# Altium PCB NORA_V0.01.PcbDoc (part 2 of 3)
Units mm, origin at the board's own origin, x right, y up, seen from the top; angles counter-clockwise.
Board outline 161.42 x 170.81 mm, 2 copper layers (Top Layer, Bottom Layer), stack 1.671 mm thick; 329 components, 221 nets, 903 pads, 560 vias.
Unrouted connection lines stored in the file: 1.
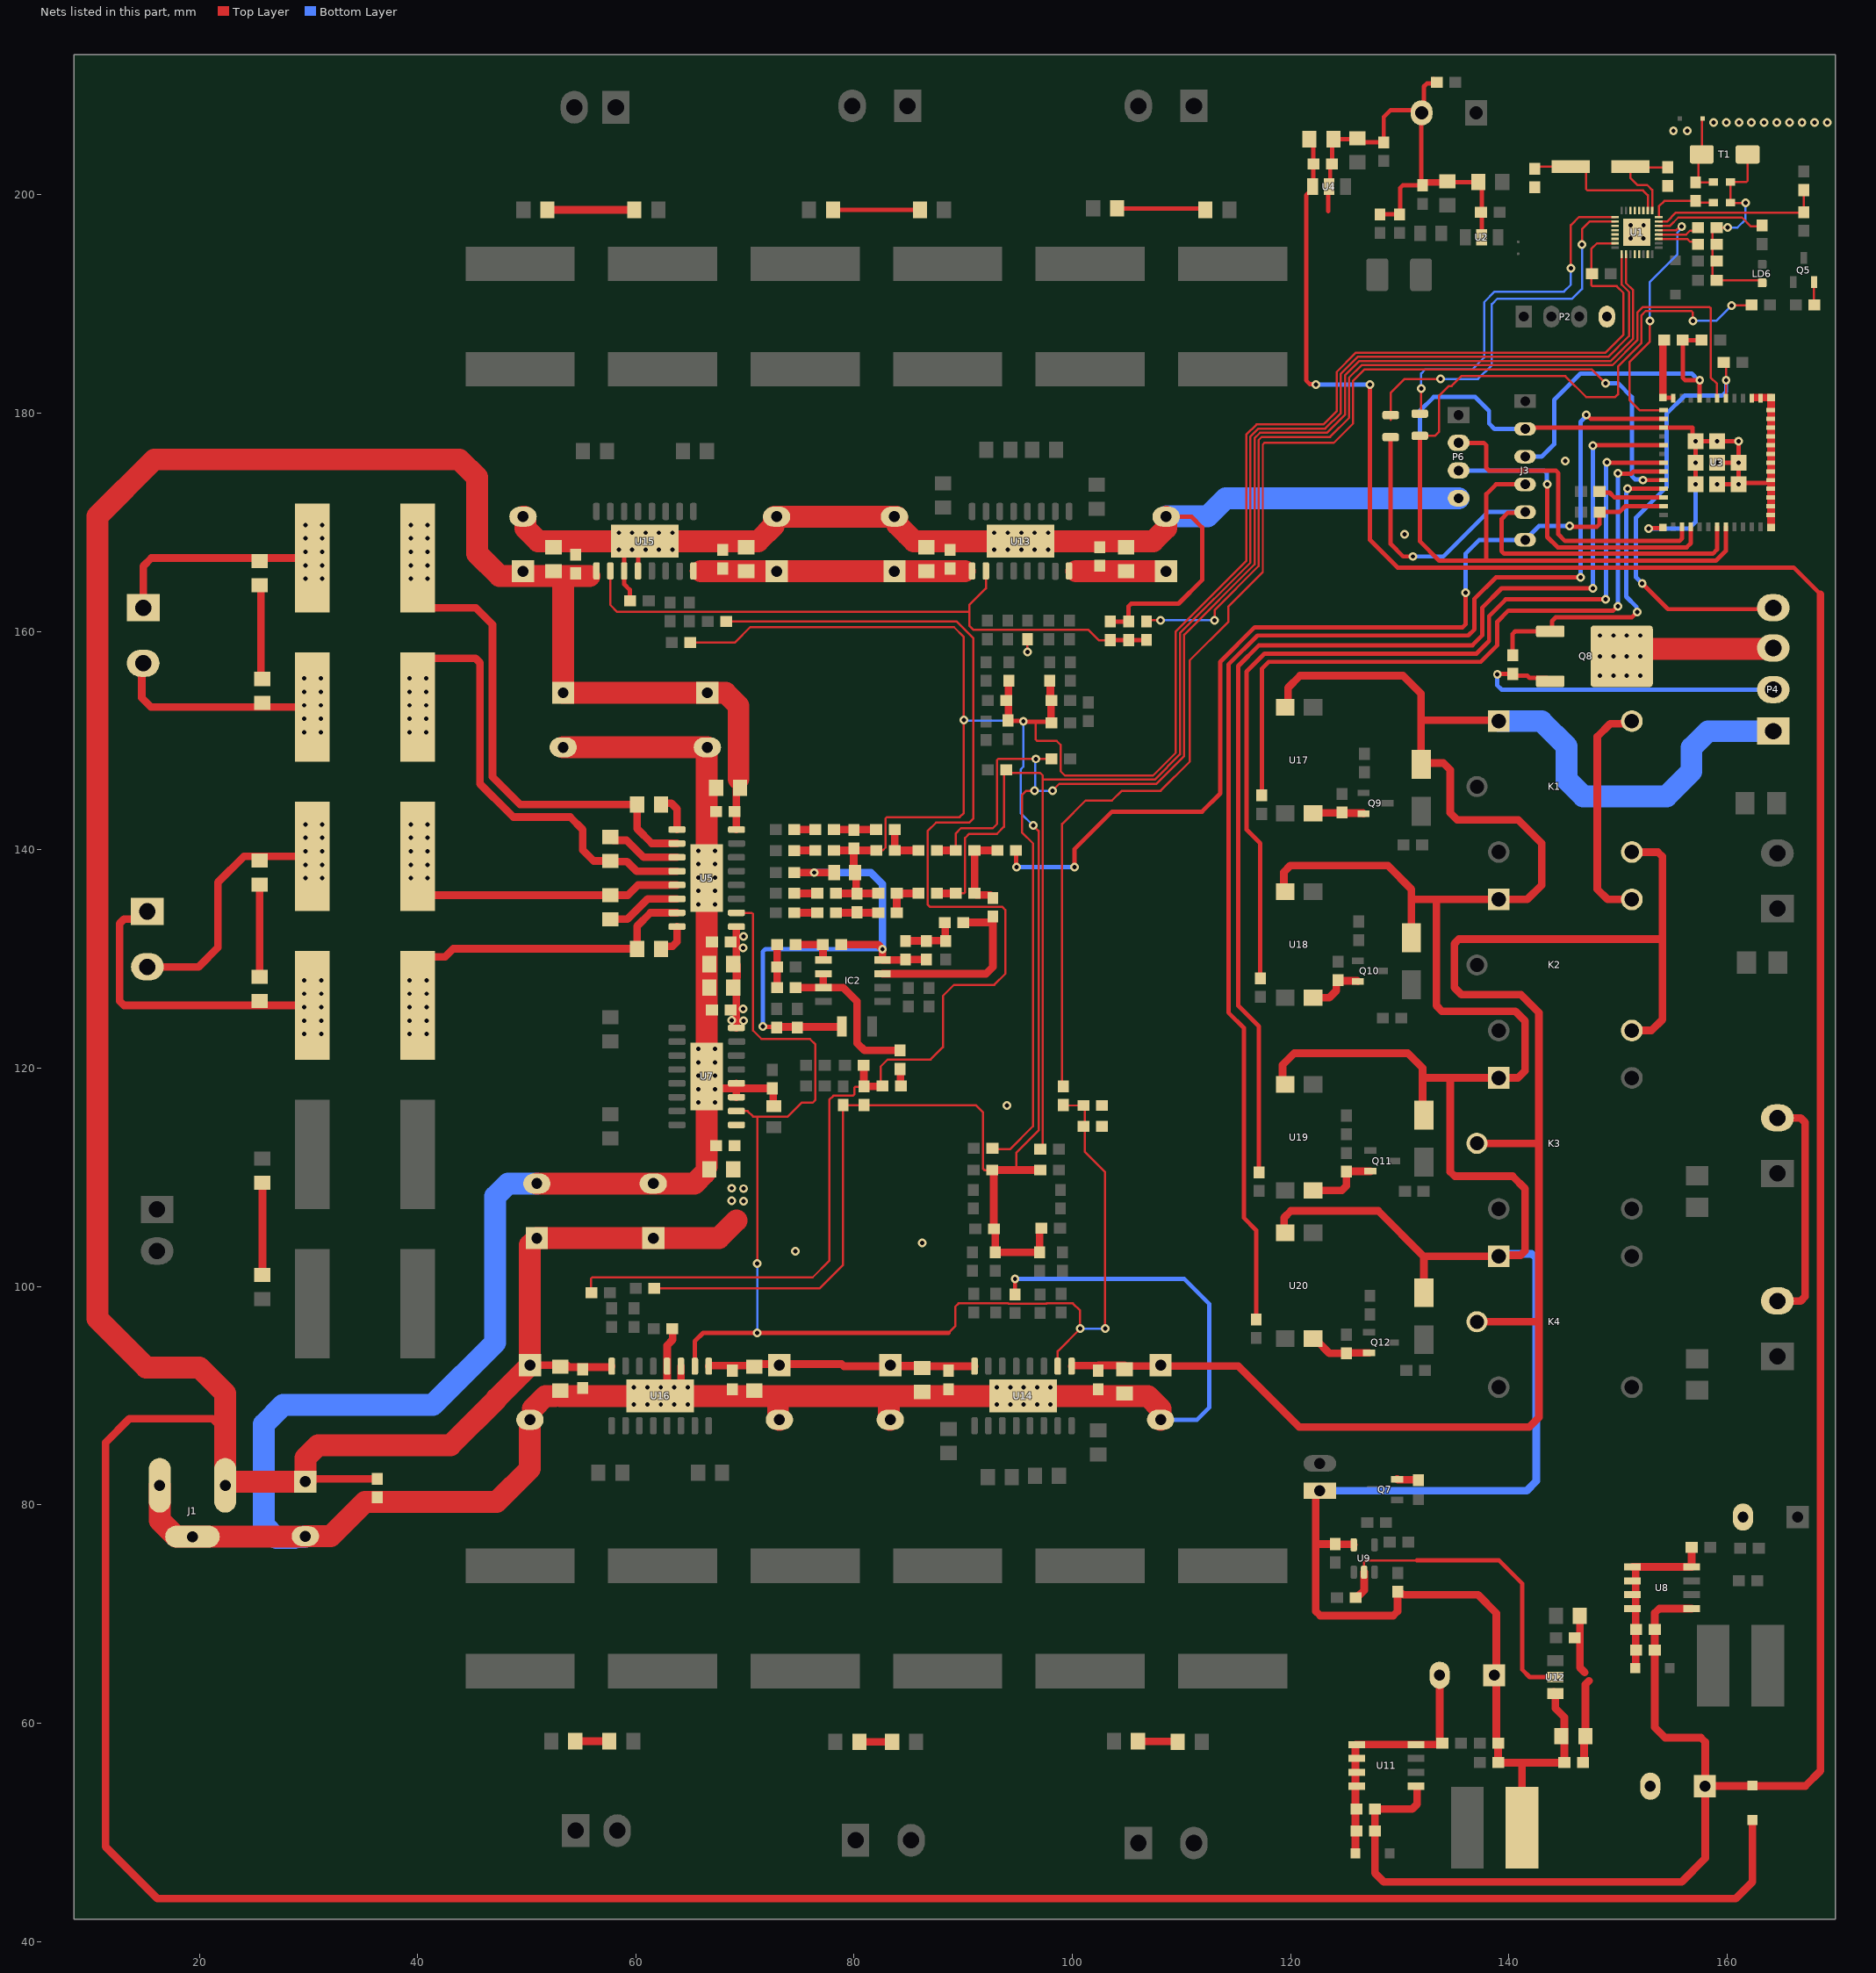
[diagram p2: the nets of this part, all layers, seen from the top]

## Via types
v1: diameter 0.8, hole 0.4, Top Layer to Bottom Layer, 560 vias

## Nets (pads, with @x,y where several pads share a name; then routed paths per layer and width w, separated by ;. In a path a pad name is that pad's centre, name@x,y a point inside that pad or via, vN(x,y) a via of type N, cw(c..) or ccw(c..) an arc to the next point about the centre after c; other vN are vias at no path point) (continued)
12V_FAN: C80.2 C81.2 C93.1 C96.1 D5.C D6.C D7.C D8.C K1.A1 K2.A1 K3.A1 K4.A1 L10.1 P4.1 R16.2 R33.2 R62.2 U6.1 U9.5 U12.3 U17.4 U18.4 U19.4 U20.4 | length 329.3
  Top Layer w0.7: U20.4@119.253,104.926 119.397,105.07 119.397,106.316 120.015,106.934 128.016,106.934 132.207,102.743 ; U19.4@119.253,118.515 119.253,120.315 120.309,121.371 130.724,121.371 132.08,120.015 132.08,115.815 D7.C@132.207,115.688 ; U18.4@119.38,136.168 119.38,137.968 119.969,138.557 128.905,138.557 131.064,136.398 D6.C@131.064,131.944 ; U17.4@119.507,153.059 119.761,153.313 119.761,154.859 120.858,155.956 130.302,155.956 131.953,154.305 D5.C@131.953,147.819 132.089,147.955 133.985,147.955 134.62,147.32 134.62,143.383 135.255,142.748 140.843,142.748 143.002,140.589 143.002,136.779 141.68,135.457 K2.A1@139.061,135.457 133.35,135.457 ; U6.1@122.665,81.299 122.301,80.935 122.301,76.327 ; U9.5@125.777,76.34 125.739,76.378 124.116,76.378 R16.2@124.079,76.415 122.389,76.415 122.301,76.327 ; R62.2@129.794,71.998 129.944,71.848 130.258,71.848 130.354,71.752 137.163,71.752 138.835,70.08 138.835,58.316 C96.1@138.985,58.166 ; R62.2@129.794,72.048 129.794,70.26 129.384,69.85 122.711,69.85 122.301,70.26 122.301,76.327 ; 131.064,135.457 133.35,135.457 ; 131.953,151.883 138.977,151.883 K1.A1@139.061,151.799 ; 132.08,118.999 132.197,119.116 134.493,119.116 ; D8.C@132.207,99.432 132.207,102.743 ; C96.1@139.026,58.166 139.026,58.044 138.998,58.016 138.998,56.416 R33.2@139.026,56.388 141.184,56.388 ; L10.1@141.184,50.419 141.184,56.388 ; U12.3@144.103,62.871 U12.3@144.253,62.721 144.253,61.36 145.073,60.54 C80.2@145.073,58.82 ; C80.2@144.806,58.82 C80.2@145.073,58.82 ; 132.207,102.743 132.238,102.774 K4.A1@139.061,102.774 139.157,102.87 141.068,102.87 141.478,103.28 141.478,108.966 140.335,110.109 135.03,110.109 134.62,110.519 134.62,118.989 134.493,119.116 ; 133.35,135.457 133.35,125.73 133.858,125.222 140.589,125.222 141.478,124.333 141.478,119.761 140.833,119.116 K3.A1@139.061,119.116 134.493,119.116 ; 141.184,56.388 C81.2@145.073,56.388 C80.2@145.073,58.82
  Bottom Layer w0.7: U6.1@122.665,81.299 141.624,81.299 142.494,82.169 142.494,102.587 142.084,102.997 139.284,102.997 K4.A1@139.061,102.774
  Bottom Layer w2: K1.A1@139.061,151.799 142.968,151.799 145.288,149.479 145.288,146.431 146.812,144.907 154.432,144.907 156.718,147.193 156.718,149.352 158.242,150.876 P4.1@164.211,150.876
12V_P: 
24V_P: C6.1 C12.2 C13.1 C14.1 C16.2 C22.1 C24.1 C25.1 C26.2 C27.1 C28.1 C53.1 C55.2 C56.1 C84.1 C85.2 C86.1 C87.1 C88.2 C103.1 C138.1 C139.2 C140.1 C141.1 C143.2 C144.1 C145.1 C146.2 C147.1 C148.1 C149.2 C150.1 C167.1 C168.2 C169.1 C170.1 C171.2 C172.1 D1.2 J1.1 K1.NO K2.NO K3.COM K4.COM U5.1 U5.8 U7.1 U7.8 U13.1 U13.8 U14.1 U14.8 U15.1 U15.8 U16.1 U16.8 | length 709.5
  Top Layer w0.7: 22.375,86.718 21.209,87.884 13.589,87.884 11.41,85.705 11.41,48.686 16.154,43.942 160.782,43.942 162.306,45.466 D1.2@162.306,51.13 ; C25.1@29.718,82.129 29.973,82.384 C24.1@36.322,82.384 ; C170.1@50.292,92.797 50.293,92.796 53.699,92.796 53.873,92.622 57.735,92.622 57.785,92.672 U16.8@57.785,92.699 ; U15.8@65.278,165.55 65.913,165.55 ; U16.1@66.675,92.699 66.724,92.748 70.866,92.748 71.018,92.9 78.867,92.9 79.069,92.699 ; U5.1@69.215,132.715 C16.2@69.215,129.54 ; U5.8@69.215,141.859 69.215,143.51 69.215,145.669 69.215,146.685 ; C141.1@83.263,92.699 79.069,92.699 ; C141.1@83.312,92.797 83.263,92.748 C143.2@86.233,92.748 ; C144.1@88.646,92.699 U14.8@91.031,92.699 79.069,92.699 ; 90.17,165.55 U13.1@90.805,165.55 ; U13.8@99.695,165.55 99.71,165.535 100.33,165.535 ; U14.1@99.921,92.699 99.97,92.748 102.362,92.748 102.387,92.773 C88.2@104.775,92.773 ; C88.2@104.775,92.413 105.072,92.71 115.189,92.71 120.777,87.122 141.859,87.122 142.748,88.011 142.748,96.774 ; K4.COM@137.061,96.774 142.748,96.774 ; K3.COM@137.061,113.116 142.748,113.116 ; K2.NO@151.261,123.457 153.048,123.457 154.051,124.46 154.051,131.925 ; K1.NO@151.261,139.799 153.641,139.799 154.051,139.389 154.051,131.925 ; C12.2@69.215,127.381 69.215,128.27 ; C12.2@69.215,127.381 U7.8@69.215,123.698 69.215,128.27 ; C12.2@69.215,127.381 69.215,128.333 C16.2@69.215,129.54 ; 69.215,128.27 69.278,128.333 ; 69.215,128.27 69.278,128.333 ; C16.2@69.215,129.54 69.278,129.476 69.278,128.333 ; 142.748,96.774 142.748,113.116 ; 142.748,113.116 142.748,125.095 141.097,126.746 135.636,126.746 135.001,127.381 135.001,131.416 135.411,131.826 153.952,131.826 154.051,131.925
  Top Layer w2: J1.1@22.375,81.788 J1.1@22.375,82.129 ; 53.34,164.635 C14.1@53.34,154.392 C27.1@66.548,154.392 66.564,154.376 68.234,154.376 69.406,153.204 69.406,146.494 ; 55.753,165.1 54.483,165.1 53.34,165.1 52.451,165.1 49.657,165.1 47.498,165.1 45.455,167.143 45.455,174.128 43.815,175.768 15.875,175.768 10.668,170.561 10.668,97.057 15.142,92.583 20.008,92.583 22.375,90.216 22.375,86.718 J1.1@22.375,82.129 ; 65.942,165.521 C167.1@72.898,165.521 C86.1@83.693,165.521 90.141,165.521 ; 69.229,106.059 67.604,104.434 C53.1@50.927,104.434 50.292,103.799 C170.1@50.292,92.797 47.236,89.741 47.236,89.683 43.024,85.471 30.89,85.471 29.718,84.299 C25.1@29.718,82.129 J1.1@22.375,82.129 ; 100.33,165.535 100.344,165.521 C138.1@108.585,165.521
  other v1: 69.85,107.823 68.797,107.862 69.85,108.966 68.797,109.005 69.85,124.333 68.797,124.372 69.811,125.439 69.811,131.027 69.85,132.08
AB/D: R65.1 U1.14 | length 10.2
  Top Layer w0.2: U1.14@153.726,197.169 154.751,197.169 155.507,197.925 161.358,197.925 162.179,197.104 163.107,197.104 R65.1@163.195,197.192
ADKEY: R25.2 R37.2 U1.15 | length 15.7
  Top Layer w0.2: U1.15@153.726,197.569 153.736,197.559 154.469,197.559 155.284,198.374 166.971,198.374 R37.2@167.005,198.408 R25.2@167.005,200.445
AGND: C5.2 C11.2 C29.2 C40.1 C43.2 C118.2 C119.2 C126.2 C127.2 C161.2 C162.2 L1.2 R1.2 R2.2 R3.1 R35.2 R56.1 R58.1 R60.2 R64.2 R80.2 R81.2 R82.2 R83.2 U1.31 | length 298.3
  Top Layer w0.2: C162.2@61.683,99.822 76.835,99.822 78.994,101.981 C43.2@78.994,116.625 C40.1@80.899,116.625 91.147,116.625 91.821,115.951 91.821,110.79 91.938,110.673 R82.2@92.643,110.673 ; C161.2@64.985,159.004 69.088,159.004 70.485,160.401 89.154,160.401 90.043,159.512 v1(90.043,151.892) 90.043,143.383 89.662,143.002 82.996,143.002 82.879,142.885 82.879,140.21 82.623,139.954 R35.2@82.027,139.954 ; 94.843,110.673 94.843,112.242 96.901,114.3 96.901,141.732 v1(96.393,142.24) ; 96.647,151.746 96.647,150.104 96.764,149.987 98.552,149.987 98.913,149.626 98.913,147.213 99.315,146.811 107.382,146.811 109.474,148.903 109.474,160.02 115.923,166.469 115.923,178.026 116.868,178.971 123.008,178.971 124.206,180.169 124.206,183.769 125.984,185.547 148.844,185.547 150.496,187.199 150.496,191.007 149.86,191.643 147.659,191.643 147.542,191.76 147.542,195.04 148.071,195.569 U1.31@149.716,195.569
  Top Layer w0.4: R56.1@94.146,151.892 94.228,151.809 95.46,151.809 95.523,151.746 96.647,151.746 97.975,151.746 R80.2@98.083,151.638
  Top Layer w0.7: C5.2@78.15,139.954 R1.2@79.967,139.954 ; C11.2@78.32,136.017 R2.2@80.225,136.017 ; R1.2@79.967,140.12 R1.2@79.967,139.954 ; R2.2@80.264,135.978 R2.2@80.225,136.017 ; R2.2@80.264,136.017 R3.1@82.208,136.017 ; R35.2@82.027,139.954 R1.2@79.967,139.954 ; R82.2@92.643,110.673 R82.2@92.648,110.673 ; R56.1@94.146,151.892 94.146,153.67 94.146,155.448 C118.2@94.184,155.487 ; R58.1@97.039,110.673 94.843,110.673 R82.2@92.648,110.673 ; R64.2@97.166,105.339 97.15,105.339 97,105.189 C119.2@97,103.141 C127.2@92.936,103.141 92.936,105.145 R83.2@92.798,105.283 92.798,110.523 R82.2@92.648,110.673 ; C126.2@97.917,155.487 97.981,155.423 97.981,153.67 98.044,153.607 R80.2@98.044,151.788 ; R1.2@79.967,139.954 79.967,138.038 L1.2@80.083,137.922 80.174,137.832 80.174,136.068 R2.2@80.225,136.017
  Bottom Layer w0.2: v1(90.043,151.892) 90.106,151.828 95.441,151.828 v1(95.504,151.765) 95.504,147.62 95.25,147.366 95.25,143.383 v1(96.393,142.24)
AUX_DET: U1.7
AUXL: U1.5
AUXR: U1.4
BackLight: R97.1 U3.16 | length 103.7
  Top Layer w0.4: R97.1@117.094,110.451 117.094,123.825 115.189,125.73 115.189,156.845 117.094,158.75 136.652,158.75 137.541,159.639 137.541,162.179 139.319,163.957 v1(147.701,163.957) ; v1(147.701,177.038) 147.739,177.076 U3.16@154.157,177.076
  Bottom Layer w0.4: v1(147.701,163.957) v1(147.701,177.038)
BASS+: C37.1 IC2.3 R9.2 | length 17.8
  Top Layer w0.7: IC2.3@82.595,128.651 92.075,128.651 92.71,129.286 92.71,133.35 C37.1@92.71,133.604 ; R9.2@90.004,133.35 92.456,133.35 C37.1@92.71,133.604 ; C37.1@92.71,133.897 C37.1@92.71,133.604
BT_OSCI: C62.1 U1.17 Y1.1 | length 8.8
  Top Layer w0.2: U1.17@153.121,198.574 153.121,200.447 152.654,200.914 151.765,200.914 151.142,201.537 Y1.1@151.142,202.592 151.208,202.526 C62.1@154.559,202.526
BT_OSCO: C61.2 U1.18 Y1.2 | length 13.8
  Top Layer w0.2: C61.2@142.367,202.399 142.56,202.592 146.566,202.592 147.066,202.092 147.066,200.523 147.183,200.406 152.273,200.406 152.721,199.958 U1.18@152.721,198.574
BT_RF: C54.2 L28.1 U1.16 | length 6.3
  Top Layer w0.2: U1.16@153.726,197.969 153.726,198.938 154.236,199.448 C54.2@157.099,199.448 157.265,199.282 L28.1@158.737,199.282
CS1: U1.19
CS2: U1.20
CS3: U1.21
CS4: U1.22
CS5: J4.2 U1.25 | length 33.6
  Top Layer w0.2: J4.2@131.826,179.959 131.953,180.086 v1(131.953,182.245) ; v1(145.669,193.294) 145.669,197.231 146.407,197.969 U1.25@149.716,197.969
  Bottom Layer w0.2: v1(131.953,182.245) 131.953,183.642 132.334,184.023 136.652,184.023 137.731,185.102 137.731,190.183 138.684,191.135 145.034,191.135 145.669,191.77 v1(145.669,193.294)
CS6: J6.2 U1.26 | length 36
  Top Layer w0.2: 129.159,179.4 J6.2@129.159,179.832 129.159,181.864 130.429,183.134 v1(133.731,183.134) ; v1(146.685,195.453) 146.685,196.85 147.404,197.569 U1.26@149.716,197.569
  Bottom Layer w0.2: v1(133.731,183.134) 137.16,183.134 138.43,184.404 138.43,189.101 138.432,189.103 ; 138.43,189.103 138.43,189.992 138.938,190.5 145.796,190.5 146.685,191.389 v1(146.685,195.453)
CS7: U1.27
CTRL: C10.2 R4.2 R5.1 U13.2 U15.2 | length 58.7
  Top Layer w0.2: U15.2@57.658,165.55 57.658,162.433 58.293,161.798 90.551,161.798 ; U13.2@92.075,165.55 92.075,163.957 90.551,162.433 90.551,161.798 ; R5.1@103.462,159.213 102.407,159.213 101.473,160.147 90.932,160.147 90.551,160.528 90.551,161.798
  Top Layer w0.4: R5.1@103.462,159.213 C10.2@105.151,159.213 105.161,159.223 106.774,159.223 R4.2@106.783,159.232
CTRL_S: C63.2 R23.2 R24.1 U5.2 U7.2 U14.2 U16.2 | length 123.2
  Top Layer w0.2: U7.2@69.215,116.078 70.231,116.078 70.739,115.57 71.12,115.57 ; U5.2@69.215,134.239 70.612,134.239 70.739,134.112 70.739,132.842 70.739,123.444 71.501,122.682 75.946,122.682 76.454,122.174 76.454,117.094 76.2,116.84 75.184,116.84 73.914,115.57 71.12,115.57 ; v1(71.12,102.108) 71.12,115.57 ; 88.646,95.758 89.258,96.37 89.258,98.148 89.566,98.456 94.115,98.456 94.126,98.445 97.644,98.445 97.655,98.456 100.045,98.456 100.711,97.79 v1(100.711,96.139) 98.651,94.079 U14.2@98.651,92.699 ; R23.2@99.149,116.625 99.188,116.586 R24.1@101.004,116.586 101.131,116.459 101.131,112.351 102.997,110.485 v1(102.997,96.139)
  Top Layer w0.4: U16.2@65.405,92.699 65.405,94.996 66.167,95.758 v1(71.12,95.758) 88.646,95.758
  Bottom Layer w0.2: v1(71.12,95.758) v1(71.12,102.108) ; v1(100.711,96.139) v1(102.997,96.139)
DACL: R6.2 R34.2 R76.2 R77.2 U1.2 | length 153.1
  Top Layer w0.2: R6.2@89.32,139.954 89.32,141.517 89.789,141.986 92.71,141.986 93.091,142.367 93.091,146.177 93.091,148.219 93.208,148.336 v1@96.393,148.336 ; R77.2@92.671,112.649 92.742,112.578 94.29,112.578 96.393,114.681 96.393,140.589 95.377,141.605 95.377,145.034 95.758,145.415 v1(96.52,145.415) ; v1(96.647,148.336) R76.2@98.083,148.336 ; v1(98.171,145.415) 98.806,146.05 107.696,146.05 110.236,148.59 110.236,159.707 116.683,166.154 116.683,177.711 117.183,178.211 123.323,178.211 124.966,179.854 124.966,183.454 126.298,184.786 149.324,184.786 151.384,186.846 151.384,191.262 150.721,191.925 U1.2@150.721,194.564
  Top Layer w0.7: R34.2@87.591,139.954 R6.2@89.32,139.954
  Bottom Layer w0.2: v1(96.52,145.415) v1@96.584,145.478 ; v1(96.647,148.336) 96.584,148.273 v1@96.584,145.478 ; v1(98.171,145.415) 96.647,145.415 v1@96.584,145.478
DACR: R29.2 R36.1 R66.2 R69.2 U1.1 | length 148.5
  Top Layer w0.2: R36.1@89.32,136.017 90.053,136.017 90.17,136.134 90.17,141.097 90.551,141.478 93.091,141.478 93.726,142.113 93.726,147.105 R66.2@93.941,147.32 94.195,147.066 97.028,147.066 97.282,146.812 97.282,146.431 ; R69.2@97.057,112.578 97.282,112.803 97.282,146.431 ; U1.1@150.321,194.564 150.321,191.787 151.003,191.106 151.003,187.071 149.098,185.166 126.14,185.166 124.586,183.612 124.586,180.012 123.165,178.591 117.025,178.591 116.303,177.869 116.303,166.312 109.855,159.864 109.855,148.746 107.54,146.431 97.282,146.431
  Top Layer w0.7: R29.2@87.591,136.017 R36.1@89.32,136.017
DCVDD: C19.1 U1.12 | length 3.9
  Top Layer w0.2: U1.12@153.726,196.369 154.907,196.369 154.919,196.357 156.225,196.357 156.588,196.72 157.038,196.72 C19.1@157.321,197.004
EN: C1.2 J3.3 R11.2 U3.8 | length 30.3
  Top Layer w0.4: U3.8@157.457,181.376 157.457,182.984 v1(157.48,183.007) 156.151,183.007 155.917,183.241 C1.2@155.917,186.69 R11.2@157.646,186.69
  Bottom Layer w0.4: J3.3@141.478,176.022 143.002,176.022 144.145,177.165 144.145,181.229 146.558,183.642 156.737,183.642 157.372,183.007 v1(157.48,183.007)
EQ: C37.2 C64.2 R6.1 R36.2 | length 7.9
  Top Layer w0.7: C37.2@92.71,135.597 92.71,135.647 92.49,135.867 91.22,135.867 91.07,136.017 91.039,136.017 91.039,139.934 91.059,139.954 C64.2@93.13,139.954
GND: C1.1 C6.2 C7.1 C9.2 C10.1 C12.1 C13.2 C14.2 C15.1 C16.1 C18.2 C19.2 C22.2 C23.2 C24.2 C25.2 C26.1 C27.2 C28.2 C30.1 C33.1 C35.1 C41.2 C42.1 C44.2 C45.1 C47.1 C49.2 C51.2 C52.2 C53.2 C55.1 C56.2 C57.2 C58.1 C59.1 C60.1 C61.1 C62.2 C63.1 C74.1 C76.1 C77.1 C80.1 C81.1 C82.1 C83.1 C84.2 C85.1 C86.2 C87.2 C88.1 C91.1 C92.1 C93.2 C94.1 C95.1 C97.1 C98.1 C99.1 C100.1 C101.1 C102.1 C103.2 C106.1 C107.1 C116.2 C117.2 C120.1 C121.1 C123.1 C125.1 C134.2 C135.2 C138.2 C139.1 C140.2 C141.2 C142.2 C143.1 C144.2 C145.2 C146.1 C147.2 C148.2 C149.1 C150.2 C153.1 C154.1 C155.1 C157.1 C159.2 C160.2 C167.2 C168.1 C169.2 C170.2 C171.1 C172.2 D2.2 D4.2 IC2.4 J1.2 J1.3 J3.2 J8.2 J9.2 K1.NC K2.NC L1.1 L28.2 L29.2 LD6.1 P2.4 P4.3 P6.4 Q5.2 Q7.2 Q8.2 Q9.2 Q10.2 Q11.2 Q12.2 R5.2 R13.1 R24.2 R30.1 R32.1 R46.2 R51.1 R63.2 R68.1 R91.1 R95.1 R99.1 R103.1 T1.A U1.33 U2.2 U3.1 U3.2 U3.11 U3.14 U3.36 U3.37 U3.38 U3.39 U3.40 U3.41 U3.42 U3.43 U3.44 U3.45 U3.46 U3.47 U3.48 U3.49_1 U3.49_2 U3.49_3 U3.49_4 U3.49_5 U3.49_6 U3.49_7 U3.49_8 U3.49_9 U3.50 U3.51 U3.52 U3.53 U4.2 U5.17 U7.3 U7.4 U7.17 U8.4 U8.5 U8.6 U8.7 U8.8 U9.2 U11.4 U11.5 U11.6 U11.7 U11.8 U12.2 U13.17 U14.17 U15.3 U15.4 U15.17 U16.3 U16.4 U16.17 U17.2 U18.2 U19.2 U20.2 | length 836.6
  Top Layer w0.2: v1(95.885,158.115) C120.1@95.885,159.297 ; U9.2@126.727,73.83 126.727,74.74 126.895,74.908 131.572,74.908 ; R63.2@131.699,82.257 R63.2@131.727,82.285 ; v1(160.049,197.006) 159.023,197.006 158.64,196.623 158.64,195.861 C52.2@159.021,195.48 158.64,195.099 158.64,194.337 C51.2@159.021,193.956 158.64,193.575 158.64,192.559 C44.2@159.021,192.178 159.033,192.19 162.941,192.19 LD6.1@163.195,191.936 ; v1(161.671,199.263) 160.306,199.263 L28.2@160.287,199.282 L29.2@160.287,201.187 161.749,201.187 161.866,201.304 T1.A@161.866,203.708 ; Q5.2@167.955,192.013 167.955,189.965 R46.2@167.982,189.938
  Top Layer w0.4: C155.1@59.425,162.814 59.436,162.825 59.436,163.83 58.928,164.338 U15.3@58.928,165.55 58.928,166.975 U15.17@59.677,167.724 ; U15.4@60.198,165.55 60.198,167.64 U15.17@60.833,168.275 ; v1(71.628,123.825) 71.672,123.781 72.854,123.781 C7.1@72.898,123.737 ; C106.1@78.062,198.628 C116.2@86.022,198.628 ; C121.1@94.742,99.275 v1(94.742,100.711) ; R5.2@103.462,160.913 C10.1@105.151,160.913 105.151,162.321 105.385,162.555 109.723,162.555 111.887,164.719 111.887,169.545 110.911,170.521 C138.2@108.585,170.521 ; C123.1@104.097,198.755 112.057,198.755 C134.2@112.184,198.628 ; 123.444,198.501 123.444,200.759 U4.2@123.616,200.931 ; U4.2@123.516,200.759 123.616,200.859 U4.2@123.616,200.931 ; C100.1@123.616,202.819 123.786,202.989 123.786,204.556 123.684,204.657 123.461,204.657 C97.1@123.909,205.105 ; C100.1@123.786,202.819 123.616,202.649 U4.2@123.616,200.931 ; C97.1@123.909,205.109 126.031,205.109 C101.1@126.111,205.189 126.488,204.812 C102.1@128.338,204.812 ; C60.1@128.181,198.208 C59.1@129.959,198.208 130.048,198.297 130.048,200.66 130.282,200.894 132.061,200.894 C98.1@132.08,200.875 132.246,201.041 134.155,201.041 C99.1@134.366,201.252 131.953,201.252 131.953,207.478 132.207,207.732 132.207,209.931 132.473,210.197 133.274,210.197 C74.1@133.389,210.312 C74.1@133.096,210.605 ; C102.1@128.524,204.812 128.524,207.137 129.159,207.772 131.739,207.772 C142.2@131.993,207.518 ; 131.572,74.908 139.087,74.908 141.224,72.771 141.224,64.897 141.9,64.221 U12.2@144.253,64.221 ; C99.1@134.474,201.144 137.143,201.144 C94.1@137.186,201.187 137.5,200.873 U2.2@137.5,196.107 ; J3.2@141.478,178.562 141.592,178.676 146.685,178.676 ; C61.1@142.367,200.649 C61.1@142.367,200.699 ; 146.742,178.676 U3.14@154.157,178.676 156.832,178.676 156.832,177.701 v1(157.082,177.451) ; v1(152.781,169.418) 152.835,169.472 154.053,169.472 U3.51@154.107,169.526 ; U3.52@154.107,181.426 154.132,181.401 155.057,181.401 U3.11@155.057,181.376 ; C62.2@154.559,200.826 C62.2@154.609,200.776 ; v1(157.082,173.501) v1(157.082,175.476) v1(157.082,177.451) ; v1(159.057,173.501) v1(161.032,173.501) ; v1(159.057,175.476) U3.49_2@160.859,175.476 ; 164.007,173.609 161.14,173.609 v1(161.032,173.501) ; v1(157.082,177.451) v1(159.057,177.451) v1(161.032,177.451) v1(161.032,175.476) v1(161.032,173.501)
  Top Layer w0.7: C35.1@25.527,128.354 C41.2@25.527,136.822 ; C18.2@25.527,164.254 25.654,164.127 25.654,155.786 C15.1@25.781,155.659 ; C47.1@25.781,101.049 C49.2@25.781,109.517 ; C153.1@51.9,198.628 C159.2@59.86,198.628 ; C146.1@52.451,167.724 C146.1@52.451,168.275 ; C160.2@54.44,58.349 C154.1@57.574,58.349 ; U16.17@62.23,89.974 62.985,89.974 64.135,91.124 U16.3@64.135,92.699 ; U16.17@62.865,90.609 U16.4@62.865,92.699 62.865,94.615 63.373,95.123 63.373,96.1 C157.1@63.334,96.139 ; U7.17@66.49,119.253 67.594,118.149 69.215,118.149 ; U7.3@69.215,117.348 69.215,118.149 ; U7.4@69.215,118.618 69.215,118.149 ; C168.1@70.104,167.724 C168.1@70.104,168.275 ; R68.1@72.644,116.532 72.581,116.596 72.581,118.085 C45.1@72.517,118.149 69.215,118.149 ; C7.1@72.898,123.737 72.942,123.781 78.823,123.781 C42.1@78.867,123.825 ; C58.1@74.51,137.922 v1(76.334,137.922) L1.1@78.159,137.922 ; C30.1@78.828,131.318 82.185,131.318 v1(82.595,130.908) IC2.4@82.595,129.921 84.67,129.921 C33.1@84.709,129.96 R13.1@86.614,129.96 ; C135.2@80.475,58.293 C125.1@83.482,58.293 ; C117.2@106.002,58.349 106.03,58.321 109.616,58.321 C107.1@109.644,58.293 ; U20.2@121.793,95.226 121.994,95.025 122.412,95.025 123.545,93.892 R103.1@125.095,93.892 125.122,93.919 Q12.2@127.17,93.919 ; U19.2@122.047,108.815 124.685,108.815 125.095,109.225 R99.1@125.095,110.529 125.122,110.556 Q11.2@127.297,110.556 ; U18.2@122.047,126.468 123.542,126.468 124.183,127.109 124.183,127.905 R95.1@124.333,128.055 124.383,128.005 126.104,128.005 Q10.2@126.154,127.955 ; U17.2@122.047,143.359 122.079,143.391 124.682,143.391 R91.1@124.714,143.422 124.764,143.372 126.612,143.372 Q9.2@126.662,143.322 ; D4.2@125.923,48.082 125.923,58.014 125.948,58.039 U11.5@126.066,58.039 U11.4@131.49,58.039 133.77,58.039 R32.1@133.897,58.166 133.847,58.166 133.697,58.316 133.697,58.366 133.644,58.419 C93.2@133.644,64.389 ; R51.1@125.945,71.501 126.095,71.651 126.202,71.651 126.727,72.175 U9.2@126.727,73.83 ; Q7.2@129.751,82.357 129.801,82.307 131.649,82.307 R63.2@131.699,82.257 ; C82.1@146.496,69.833 146.496,65.086 146.939,64.643 ; C81.1@146.773,56.388 146.89,56.504 146.89,58.813 C80.1@146.883,58.82 ; C80.1@147.006,58.82 147.006,59.19 146.883,59.313 147.006,59.436 147.006,63.567 147.32,63.881 ; K2.NC@151.261,135.457 149.023,135.457 148.082,136.398 148.082,150.368 149.268,151.554 151.016,151.554 K1.NC@151.261,151.799 ; U8.5@151.322,74.314 U8.5@151.59,74.314 ; D2.2@151.57,65.043 151.615,65.088 151.615,74.289 U8.5@151.59,74.314 ; U3.52@154.107,181.426 154.107,186.58 C1.1@154.217,186.69 ; R30.1@156.74,76.092 156.743,76.089 156.743,74.317 U8.4@156.746,74.314 U8.5@151.59,74.314 ; U3.2@162.433,181.426 U3.53@164.007,181.426 164.007,173.609 U3.50@164.007,169.526 ; J9.2@164.592,98.679 166.722,98.679 167.132,99.089 167.132,115.033 166.722,115.443 J8.2@164.592,115.443
  Top Layer w2: J1.2@16.375,81.788 16.375,78.588 17.875,77.088 J1.3@19.375,77.088 C25.2@29.718,77.088 ; C25.2@29.718,77.129 32.044,77.129 35.179,80.264 47.244,80.264 50.292,83.312 C170.2@50.292,87.797 ; C147.2@49.657,170.521 49.797,170.521 49.882,170.435 49.882,169.447 51.054,168.275 52.451,168.275 U15.17@60.833,168.275 70.104,168.275 71.218,168.275 72.648,169.705 72.648,170.435 72.734,170.521 C167.2@72.898,170.521 C86.2@83.693,170.521 83.857,170.521 83.943,170.435 83.943,169.803 84.837,168.909 85.471,168.275 U13.17@95.25,168.275 ; 50.542,88.798 51.718,89.974 C171.1@52.593,89.974 ; C53.2@50.927,109.434 C28.2@61.595,109.434 65.365,109.434 C55.1@66.294,110.363 ; C171.1@53.086,89.974 U16.17@62.23,89.974 ; C14.2@53.34,149.392 C27.2@66.548,149.392 66.49,149.334 U5.17@66.49,137.414 U7.17@66.49,119.253 C55.1@66.49,110.972 ; U16.17@62.985,89.974 73.025,89.974 ; C150.2@73.152,87.797 73.111,87.797 73.025,87.883 73.025,89.974 ; C141.2@83.398,87.883 C141.2@83.312,87.797 83.271,87.797 83.185,87.883 83.185,89.974 ; U14.17@95.476,89.974 83.185,89.974 ; U13.17@95.885,168.275 107.413,168.275 108.585,169.447 C138.2@108.585,170.521 ; U14.17@97.282,89.974 106.905,89.974 108.077,88.802 C103.2@108.077,87.797 ; Q8.2@150.328,157.734 150.994,158.4 164.115,158.4 P4.3@164.211,158.496 ; 73.025,89.974 83.185,89.974
  Bottom Layer w0.2: v1(160.049,197.006) 160.938,197.006 161.671,197.739 v1(161.671,199.263)
  Bottom Layer w0.4: v1(71.628,123.825) 71.628,130.674 71.862,130.908 v1(82.595,130.908) ; v1(94.742,100.711) 110.236,100.711 112.522,98.425 112.522,88.9 111.419,87.797 C103.2@108.077,87.797 ; 131.826,172.212 131.826,180.213 133.096,181.483 136.906,181.483 138.176,180.213 138.176,179.05 138.664,178.562 J3.2@141.478,178.562 ; v1(152.781,169.418) 156.464,169.418 157.082,170.036 v1(157.082,173.501)
  Bottom Layer w0.7: v1(76.334,137.922) 81.534,137.922 82.595,136.861 v1(82.595,130.908)
  Bottom Layer w2: C25.2@29.718,77.129 29.632,77.043 28.818,77.043 28.736,76.962 27.08,76.962 25.908,78.134 25.908,87.376 27.686,89.154 41.402,89.154 47.117,94.869 47.117,108.262 48.289,109.434 C53.2@50.927,109.434 ; C138.2@108.585,170.521 108.625,170.561 112.395,170.561 114.046,172.212 131.826,172.212 P6.4@135.382,172.212
  other v1: 59.829,89.199 61.058,89.199 62.287,89.199 63.515,89.199 64.744,89.199 93.075,89.199 94.304,89.199 95.532,89.199 96.761,89.199 97.99,89.199 59.829,90.749 61.058,90.749 62.287,90.749 63.515,90.749 64.744,90.749 93.075,90.749 94.304,90.749 95.532,90.749 96.761,90.749 97.99,90.749 74.627,103.224 86.226,104.008 93.98,116.586 65.715,116.852 67.265,116.852 65.715,118.081 67.265,118.081 65.715,119.31 67.265,119.31 65.715,120.538 67.265,120.538 65.715,121.767 67.265,121.767 65.715,135.013 67.265,135.013 65.715,136.242 67.265,136.242 65.715,137.471 67.265,137.471 65.715,138.699 67.265,138.699 65.715,139.928 67.265,139.928 148.333,155.956 149.562,155.956 150.79,155.956 152.019,155.956 148.333,157.734 149.562,157.734 150.79,157.734 152.019,157.734 148.333,159.639 149.562,159.639 150.79,159.639 152.019,159.639 58.432,167.5 59.661,167.5 60.89,167.5 62.118,167.5 63.347,167.5 92.849,167.5 94.078,167.5 95.307,167.5 96.535,167.5 97.764,167.5 130.429,168.91 58.432,169.05 59.661,169.05 60.89,169.05 62.118,169.05 63.347,169.05 92.849,169.05 94.078,169.05 95.307,169.05 96.535,169.05 97.764,169.05 145.161,175.641 151.129,196.032 152.33,196.033 151.13,197.231 152.331,197.232 155.067,205.867 156.337,205.867 158.75,206.629 159.907,206.629 161.064,206.629 162.221,206.629 163.378,206.629 164.536,206.629 165.693,206.629 166.85,206.629 168.007,206.629 169.164,206.629
INPB: C39.2 C40.2 C163.2 C164.2 R12.2 | length 130.2
  Top Layer w0.2: C164.2@55.919,99.441 55.88,99.48 55.88,100.721 55.997,100.838 76.2,100.838 77.724,102.362 77.724,117.094 78.105,117.475 79.883,117.475 80.01,117.602 80.01,118.188 80.127,118.305 C40.2@80.894,118.305 ; C163.2@68.287,160.909 89.408,160.909 90.932,159.385 90.932,142.875 90.551,142.494 87.503,142.494 86.721,141.712 86.721,135.021 86.975,134.767 93.579,134.767 93.853,134.493 93.853,128.651 92.837,127.635 89.154,127.635 88.138,126.619 88.138,121.92 87.015,120.797 83.078,120.797 82.423,120.142 82.423,118.491 R12.2@82.569,118.345
  Top Layer w0.4: R12.2@82.569,118.345 R12.2@82.589,118.364
  Top Layer w0.7: C39.2@80.86,120.269 80.88,120.25 80.88,118.32 C40.2@80.894,118.305 ; C40.2@80.899,118.325 80.919,118.345 R12.2@82.569,118.345
IO0: U1.13 U3.12 | length 23.6
  Top Layer w0.2: v1(152.908,188.468) 152.908,186.563 151.033,184.688 151.033,181.199 151.956,180.276 U3.12@154.157,180.276 ; U1.13@153.726,196.769 155.332,196.769 155.667,197.104 v1(155.829,197.104)
  Bottom Layer w0.2: v1(152.908,188.468) 152.908,192.024 155.448,194.564 155.448,196.561 155.829,196.942 v1(155.829,197.104)
IO1: R101.1 U3.13 | length 120.6
  Top Layer w0.4: R101.1@116.84,96.989 116.84,105.156 115.697,106.299 115.697,123.698 114.3,125.095 114.3,156.972 116.967,159.639 136.271,159.639 136.843,160.21 136.843,163.005 138.811,164.973 v1(146.558,164.973) ; v1(147.066,179.832) 147.144,179.832 147.5,179.476 U3.13@154.157,179.476
  Bottom Layer w0.4: v1(146.558,164.973) 146.558,179.216 147.066,179.724 v1(147.066,179.832)
IO2: pad.4 R15.2 U3.5 | length 40.3
  Top Layer w0.2: R15.2@159.678,184.658 159.874,184.462 159.874,183.026 v1(159.893,183.007) 159.875,182.989 159.875,181.394 U3.5@159.857,181.376
  Top Layer w0.4: v1(152.209,164.401) 154.559,162.052 pad.4@163.83,162.052
  Bottom Layer w0.4: v1(152.209,164.401) 151.638,164.973 151.638,170.434 154.432,173.228 154.432,179.951 156.091,181.61 159.532,181.61 159.893,181.971 v1(159.893,183.007)
IO3: R4.1 U3.6 | length 83.1
  Top Layer w0.2: R4.1@106.783,160.932 106.887,161.036 v1(108.077,161.036) ; v1(113.03,161.036) 113.03,161.964 117.063,165.997 117.063,177.554 117.34,177.831 123.602,177.831 125.346,179.575 125.346,183.258 126.493,184.405 149.48,184.405 151.765,186.69 151.765,189.23 152.273,189.738 158.359,189.738 158.476,189.621 158.476,183.281 159.057,182.7 U3.6@159.057,181.376
  Bottom Layer w0.2: v1(108.077,161.036) v1(113.03,161.036)
IO4: R93.1 U3.18 | length 83.4
  Top Layer w0.4: R93.1@117.221,128.231 117.221,140.589 115.951,141.859 115.951,156.337 117.602,157.988 137.033,157.988 138.176,159.131 138.176,161.417 139.7,162.941 v1(148.844,162.941) ; v1(148.971,175.514) 149.009,175.476 U3.18@154.157,175.476
  Bottom Layer w0.4: v1(148.844,162.941) 148.907,163.005 148.907,175.451 v1(148.971,175.514)
IO5: R89.1 U3.19 | length 64.3
  Top Layer w0.4: R89.1@117.348,144.995 117.348,156.591 117.983,157.226 137.414,157.226 138.938,158.75 138.938,160.909 139.954,161.925 149.553,161.925 149.934,162.306 v1(149.987,162.306) ; v1(149.987,174.498) 150.038,174.447 151.187,174.447 151.416,174.676 U3.19@154.157,174.676
  Bottom Layer w0.4: v1(149.987,162.306) v1(149.987,174.498)
IO6: R23.1 U3.20 | length 120.3
  Top Layer w0.2: R23.1@99.149,118.325 99.06,118.414 99.06,142.367 101.219,144.526 103.632,144.526 104.521,145.415 108.077,145.415 110.744,148.082 110.744,157.353 114.3,160.909 114.3,162.306 117.443,165.449 117.443,177.133 117.602,177.292 123.952,177.292 125.726,179.066 125.726,182.976 126.773,184.023 147.574,184.023 v1(148.844,182.753)
  Top Layer w0.4: v1(152.273,173.876) U3.20@154.157,173.876
  Bottom Layer w0.4: v1(148.844,182.753) 149.987,182.753 151.257,181.483 151.257,174.244 151.548,173.953 152.196,173.953 v1(152.273,173.876)
IO7: Q8.1 R55.2 U3.21 | length 29.7
  Top Layer w0.4: R55.2@140.335,157.822 140.335,159.786 140.569,160.02 Q8.1@143.778,160.02 143.778,160.185 143.943,160.35 143.943,160.961 144.272,161.29 151.257,161.29 v1(151.765,161.798) ; v1(150.876,173.101) 150.901,173.076 U3.21@154.157,173.076
  Bottom Layer w0.4: v1(150.876,173.101) 150.799,173.024 150.799,172.742 150.749,172.691 150.749,163.195 151.688,162.256 151.688,161.875 v1(151.765,161.798)
IO8: R18.1 U3.22 | length 6.1
  Top Layer w0.4: R18.1@148.297,172.847 148.412,172.732 149.213,172.732 149.669,172.276 U3.22@154.157,172.276
IO9: C64.1 J3.6 R19.2 U3.23 | length 87.1
  Top Layer w0.4: C64.1@94.83,139.954 94.85,139.935 94.85,138.449 v1(94.869,138.43) ; v1(100.203,138.43) 100.203,140.081 103.632,143.51 111.887,143.51 113.538,145.161 113.538,157.226 116.713,160.401 135.763,160.401 136.017,160.655 v1(136.017,163.576) ; J3.6@141.478,168.402 J3.6@141.578,168.402 ; v1(145.542,169.672) 145.606,169.608 148.063,169.608 148.297,169.842 R19.2@148.297,170.942 150.114,170.942 150.648,171.476 U3.23@154.157,171.476
  Bottom Layer w0.4: v1(94.869,138.43) v1(100.203,138.43) ; v1(136.017,163.576) 136.017,167.132 137.287,168.402 J3.6@141.478,168.402 142.748,169.672 v1(145.542,169.672)
IO18: P6.2 U3.26 | length 29.8
  Top Layer w0.4: P6.2@135.382,177.292 137.688,177.292 137.922,177.058 137.922,174.986 138.156,174.752 144.292,174.752 144.526,174.518 144.526,168.91 145.144,168.292 155.623,168.292 155.857,168.526 U3.26@155.857,169.576
IO19: P6.3 U3.27 | length 29.2
  Top Layer w0.4: v1(143.51,173.482) 143.51,168.67 144.468,167.712 156.282,167.712 156.657,168.087 U3.27@156.657,169.576
  Bottom Layer w0.4: P6.3@135.382,174.752 143.21,174.752 143.48,174.482 143.48,173.512 v1(143.51,173.482)
IO20: J3.5 J6.1 U3.30 | length 51.7
  Top Layer w0.4: J6.1@129.159,177.8 129.159,168.021 130.302,166.878 v1(131.191,166.878) ; J3.5@141.478,170.942 141.401,170.865 139.877,170.865 139.319,170.307 139.319,167.366 139.553,167.132 158.676,167.132 159.057,167.513 U3.30@159.057,169.576
  Bottom Layer w0.4: v1(131.191,166.878) 133.985,166.878 138.049,170.942 J3.5@141.478,170.942
IO21: J3.4 J4.1 R40.2 U3.31 | length 94
  Top Layer w0.2: J4.1@131.826,177.927 133.223,177.927 133.604,178.308 133.604,181.61 134.493,182.499 134.747,182.499 135.636,183.388 145.161,183.388 147.066,181.483 149.733,181.483 149.987,181.737 149.987,184.277 152.146,186.436 152.146,188.976 152.527,189.357 156.718,189.357 156.845,189.23 v1(156.845,188.468) ; v1(160.401,189.865) 162.145,189.865 R40.2@162.218,189.938
  Top Layer w0.4: J4.1@131.826,177.927 131.826,168.275 133.604,166.497 137.922,166.497 ; J3.4@141.478,173.482 138.811,173.482 137.922,172.593 137.922,166.497 ; U3.31@159.857,169.576 159.857,167.386 158.968,166.497 137.922,166.497
  Bottom Layer w0.2: v1(156.845,188.468) 159.004,188.468 v1(160.401,189.865)
IOVDD: C52.1 U1.11 | length 3.8
  Top Layer w0.2: U1.11@153.726,195.969 156.329,195.969 156.588,195.71 157.092,195.71 C52.1@157.321,195.48
IRDA: U1.28
LED_OUT: P4.2 Q8.3 R55.1 | length 31.6
  Top Layer w0.4: v1(138.938,156.083) 138.958,156.103 140.315,156.103 R55.1@140.335,156.122 140.501,155.956 141.678,155.956 141.878,155.756 143.47,155.756 Q8.3@143.778,155.448
  Bottom Layer w0.4: v1(138.938,156.083) 138.938,155.067 139.319,154.686 P4.2@164.211,154.686
MIC_LDO: U1.30
MICIN: U1.29
NetA2_2: A2.2 C54.1 L29.1 T1.C | length 7.8
  Top Layer w0.2: A2.2@157.734,207.01 157.666,206.942 T1.C@157.666,203.708 157.353,203.395 157.353,201.402 C54.1@157.099,201.148 158.698,201.148 L29.1@158.737,201.187
NetC2_1: C2.1 C3.1 R1.1 | length 3.9
  Top Layer w0.7: C2.1@78.15,141.854 78.153,141.857 82.006,141.857 C3.1@82.009,141.859
NetC2_2: C2.2 R53.1 | length 2
  Top Layer w0.7: R53.1@74.437,141.854 C2.2@76.45,141.854
NetC3_2: C3.2 R34.1 R35.1 | length 4.1
  Top Layer w0.7: C3.2@83.709,141.859 83.718,141.85 83.718,139.963 R35.1@83.727,139.954 R34.1@85.891,139.954
NetC4_1: C4.1 C8.2 R2.1 | length 3.9
  Top Layer w0.7: C8.2@78.32,134.239 C4.1@82.208,134.239
NetC4_2: C4.2 R3.2 R29.1 | length 3.8
  Top Layer w0.7: C4.2@83.908,134.239 R3.2@83.908,136.017 R29.1@85.891,136.017
NetC5_1: C5.1 R54.1 | length 2
  Top Layer w0.7: R54.1@74.437,139.949 74.439,139.952 76.448,139.952 C5.1@76.45,139.954
NetC8_1: C8.1 R59.1 | length 2.1
  Top Layer w0.7: R59.1@74.51,134.239 C8.1@76.62,134.239
NetC11_1: C11.1 R61.1 | length 2.1
  Top Layer w0.7: R61.1@74.51,136.017 C11.1@76.62,136.017
NetC15_2: C15.2 L2.1 P1.2 | length 20.9
  Top Layer w0.7: P1.2@14.859,157.099 14.732,156.972 14.732,153.924 15.576,153.08 L2.1@30.353,153.08 30.353,153.711 v1(29.591,154.473)
  other v1: 29.591,150.787 31.141,150.787 29.591,152.016 31.141,152.016 29.591,153.245 31.141,153.245 31.141,154.473 29.591,155.702 31.141,155.702
NetC17_1: C17.1 L6.2 U5.15 | length 30.4
  Top Layer w0.7: L6.2@40.005,125.752 40.005,128.973 41.23,130.198 42.522,130.198 43.262,130.937 C17.1@60.114,130.937 60.114,133.012 61.341,134.239 U5.15@63.765,134.239
  other v1: 39.268,123.134 40.818,123.134 39.268,124.363 40.818,124.363 39.268,125.592 40.818,125.592 39.268,126.821 40.818,126.821 39.268,128.049 40.818,128.049
NetC17_2: C17.2 U5.16 | length 3.1
  Top Layer w0.7: C17.2@62.314,130.937 62.55,131.173 63.355,131.173 63.765,131.583 U5.16@63.765,132.969
NetC18_1: C18.1 L3.1 P1.1 | length 19.6
  Top Layer w0.7: P1.1@14.859,162.179 14.859,165.989 15.614,166.744 L3.1@30.353,166.744
  other v1: 29.718,164.843 31.268,164.843 29.718,166.072 31.268,166.072 29.718,167.3 31.268,167.3 29.718,168.529 31.268,168.529 29.718,169.758 31.268,169.758
NetC20_1: C20.1 L7.2 U5.13 | length 28.1
  Top Layer w0.7: L7.2@40.005,139.416 L7.2@40.92,138.501 ; v1(40.92,137.414) L7.2@40.92,138.501 ; U5.13@63.765,136.779 60.198,136.779 59.266,135.847 41.23,135.847 40.92,136.157 L7.2@40.92,138.501
  other v1: 39.37,137.414 39.37,138.643 40.92,138.643 39.37,139.871 40.92,139.871 39.37,141.1 40.92,141.1 39.37,142.329 40.92,142.329
NetC20_2: C20.2 U5.14 | length 6.9
  Top Layer w0.7: C20.2@57.658,133.647 59.225,133.647 61.087,135.509 U5.14@63.765,135.509
NetC21_1: C21.1 L2.2 U5.12 | length 43.2
  Top Layer w0.7: L2.2@40.005,153.08 40.005,156.328 41.23,157.553 45.31,157.553 45.72,157.143 45.72,146.05 48.388,143.382 48.768,143.002 53.975,143.002 55.118,141.859 55.118,139.997 56.134,138.981 C21.1@57.658,138.981 57.701,138.938 59.182,138.938 60.074,138.046 U5.12@63.765,138.046
  other v1: 39.243,150.787 40.793,150.787 39.243,152.016 40.793,152.016 39.243,153.245 40.793,153.245 39.243,154.473 40.793,154.473 39.243,155.702 40.793,155.702
NetC21_2: C21.2 U5.11 | length 6.9
  Top Layer w0.7: C21.2@57.658,141.181 57.956,140.883 59.142,140.883 60.453,139.572 60.706,139.319 U5.11@63.765,139.319
NetC23_1: C23.1 C76.2 C77.2 C91.2 C92.2 C97.2 C100.2 D1.1 U4.3 U8.1 U11.1 | length 277.8
  Top Layer w0.4: C97.2@122.016,205.006 122.086,204.936 C100.2@122.086,202.819 122.051,202.784 122.051,200.794 U4.3@122.016,200.759 122.016,200.509 121.716,200.209 121.646,200.209 121.412,199.975 121.412,183.007 121.74,182.679 122.248,182.679 v1(122.301,182.626) ; v1(127.254,182.626) 127.254,168.402 129.794,165.862 166.076,165.862 168.529,163.409
  Top Layer w0.7: U11.1@131.49,54.229 131.547,54.229 131.572,54.204 131.572,52.578 131.14,52.146 C91.2@127.723,52.146 127.723,46.267 128.524,45.466 155.829,45.466 157.988,47.625 157.988,54.189 C23.1@157.948,54.229 ; U8.1@156.746,70.504 153.77,70.504 153.36,70.094 C77.2@153.36,68.599 C76.2@153.36,66.694 153.36,59.619 154.305,58.674 157.578,58.674 157.988,58.264 157.988,54.269 157.974,54.255 162.306,54.255 167.158,54.255 168.529,55.626 168.529,163.409
  Bottom Layer w0.4: v1(122.301,182.626) v1(127.254,182.626)
NetC30_2: C30.2 IC2.5 R7.2 | length 3.5
  Top Layer w0.7: R7.2@74.637,131.318 C30.2@76.806,131.318 ; C30.2@76.928,131.318 77,131.318 77.15,131.168 77.15,130.196 IC2.5@77.171,130.175
NetC31_1: C31.1 L3.2 U5.10 | length 48.3
  Top Layer w0.7: v1(40.92,164.843) 40.005,165.758 L3.2@40.005,166.744 40.798,165.95 40.798,162.61 41.23,162.179 45.339,162.179 46.863,160.655 46.863,146.685 49.403,144.145 C31.1@60.114,144.145 60.114,141.943 61.464,140.593 U5.10@63.765,140.593
  other v1: 39.37,164.843 39.37,166.072 40.92,166.072 39.37,167.3 40.92,167.3 39.37,168.529 40.92,168.529 39.37,169.758 40.92,169.758
NetC31_2: C31.2 U5.9 | length 3.6
  Top Layer w0.7: C31.2@62.314,144.145 62.441,144.272 63.246,144.272 63.765,143.753 U5.9@63.765,141.859
NetC32_1: C32.1 C36.1 IC2.6 IC2.7 | length 15.2
  Top Layer w0.7: C36.1@74.637,127.381 IC2.7@77.171,127.381 ; IC2.6@77.171,128.397 IC2.7@77.171,127.381 ; C32.1@84.201,121.627 80.938,121.627 80.264,122.301 80.264,126.111 78.994,127.381 IC2.7@77.171,127.381
NetC32_2: C32.2 R12.1 | length 1.6
  Top Layer w0.7: C32.2@84.201,119.927 84.245,119.883 84.245,118.408 R12.1@84.289,118.364
NetC33_2: C33.2 R8.1 R9.1 R13.2 | length 5.7
  Top Layer w0.7: C33.2@84.709,131.66 86.78,131.66 R13.2@86.614,131.66 86.633,131.68 88.285,131.68 R8.1@88.304,131.699 ; R9.1@88.304,133.35 88.348,133.306 88.348,131.743 R8.1@88.304,131.699 ; R8.1@88.392,131.66 88.353,131.699 R8.1@88.304,131.699
NetC34_1: C41.1 L7.1 P3.2 | length 22.8
  Top Layer w0.7: P3.2@15.24,129.286 19.939,129.286 21.717,131.064 21.717,137.033 24.1,139.416 L7.1@30.353,139.416
  other v1: 29.718,137.414 31.268,137.414 29.718,138.643 31.268,138.643 29.718,139.871 31.268,139.871 29.718,141.1 31.268,141.1 29.718,142.329 31.268,142.329
NetC34_2: C35.2 L6.1 P3.1 | length 27.9
  Top Layer w0.7: P3.1@15.24,134.366 14.535,133.661 13.11,133.661 12.7,133.251 12.7,126.162 13.11,125.752 25.527,125.752 L6.1@30.353,125.752
  other v1: 29.616,123.134 31.166,123.134 29.616,124.363 31.166,124.363 29.616,125.592 31.166,125.592 29.616,126.821 31.166,126.821 29.616,128.049 31.166,128.049
NetC36_2: C36.2 R7.1 R10.1 | length 3.9
  Top Layer w0.7: C36.2@72.937,127.381 R7.1@72.937,131.318